# EAGLE board waterius-factory-3.2 (EAGLE 9.0.1)
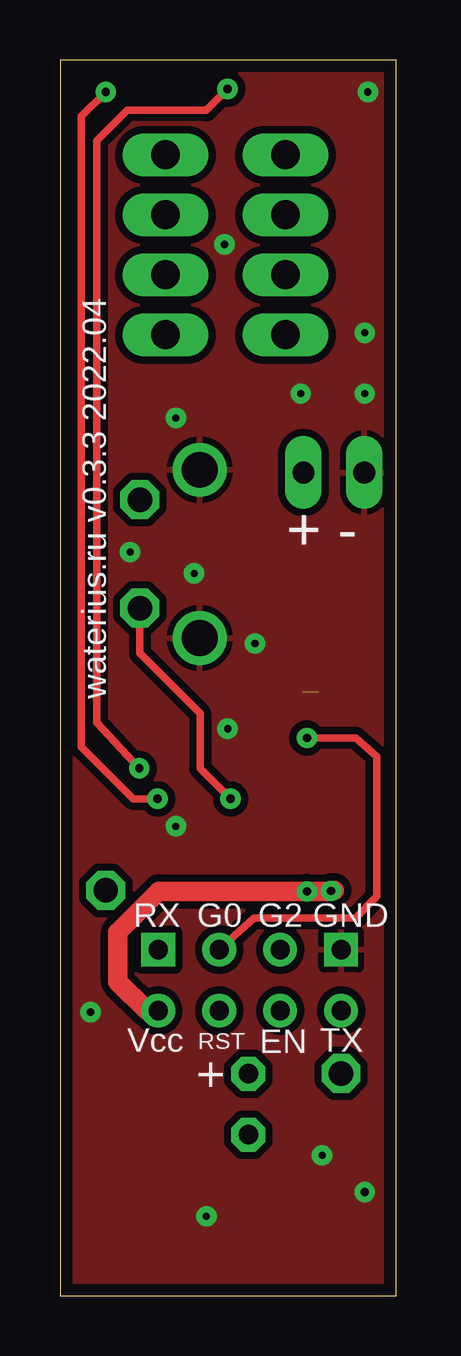
[diagram p0: board, top side]
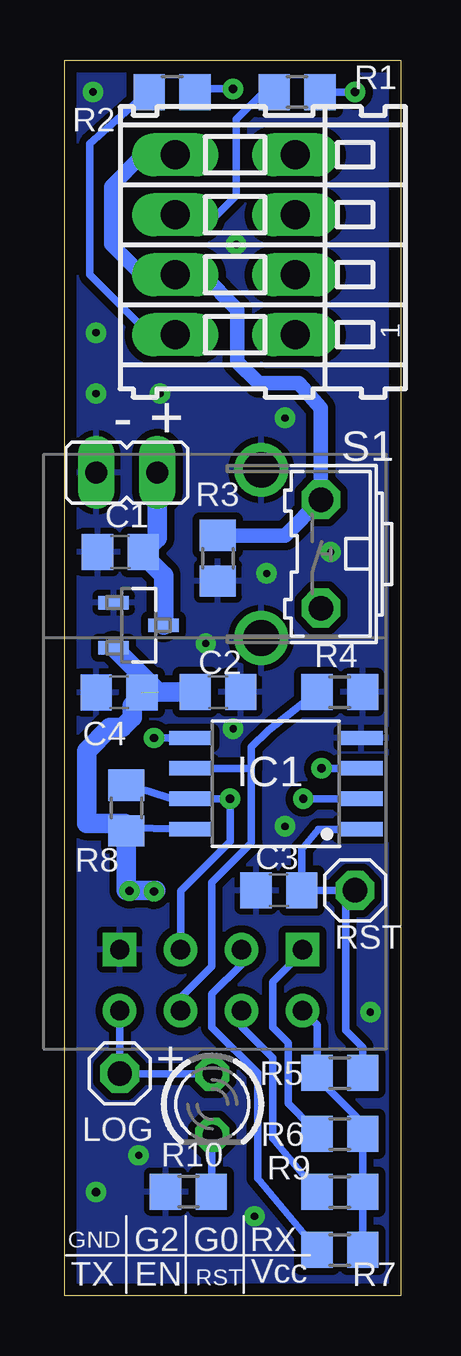
[diagram p1: board, bottom side, seen from below]

Size 14 x 51.5 mm. Coordinates in mm from the lower left corner, seen from the top.
Outline: 0,0 14,0 14,51.5 0,51.5 0,0
Copper layers (1*16): Top 0.035mm / dielectric 1.5mm / Bottom 0.035mm
Design rules "waterius-factory-3.0": minimum track width 0.25mm, minimum drill 0.3mm, track to track 0.205mm, track to pad 0.205mm, pad to pad 0.205mm, via to via 0.205mm, smd to smd 6mil, copper to edge 0.5mm, drill to drill 0.2mm, minimum pad ring 0.3mm, minimum via ring 0.25mm, stop-mask expansion 4mil, vias tented up to drill 0mil, thermal gap 10mil
Net classes: 0 default: clearance 0.205 mm; 1 power: width 0.508 mm, clearance 0.305 mm

## Footprints (pad centres in the part's own frame; a part is rotated, then mirrored left to right if it is on the bottom)
C0805 = smd 1.3 x 1.5: 1 -0.95,0; 2 0.95,0
8S2 = smd 0.6 x 1.8: 1 -1.905,-3.55; 2 -0.635,-3.55; 3 0.635,-3.55; 4 1.905,-3.55; 5 1.905,3.55; 6 0.635,3.55; 7 -0.635,3.55; 8 -1.905,3.55
JP1 = drill 0.914 long: 1 0,-1.27; 2 0,1.27
LED3MM = drill 0.813 octagon: A -1.27,0; K 1.27,0
1X01 = drill 1.016 octagon: 1 0,0
R0805 = smd 1.3 x 1.5: 1 -0.95,0; 2 0.95,0
B3F-31XX = drill 1.016 octagon: 1 -2.261,-1.245; 2 2.261,-1.245 | drill 1.499 pad 2.159: 3 -3.505,1.245; 4 3.505,1.245
ESP01 = drill 0.8: CH_PD -1.285,-8.178; GPIO0 1.255,-5.638; GPIO2 -1.285,-5.638; RST 1.255,-8.178; TX -3.825,-8.178; VCC 3.795,-8.178 | drill 0.8 square: GND -3.825,-5.638; RX 3.795,-5.638
SOT95P237X112-3N = smd 0.559 x 1.27: 1 -0.94,-1.041; 2 0.94,-1.041; 3 0,1.041
233-104 = drill 1.2 long: A1 -3.75,2.5; A2 -1.25,2.5; A3 1.25,2.5; A4 3.75,2.5; B1 -3.75,-2.5; B2 -1.25,-2.5; B3 1.25,-2.5; B4 3.75,-2.5

## Placement (x,y rotation side)
C1  1uF  [C0805]  11.68,30.99 180 bottom
C2  0.1uF  [C0805]  7.62,25.15 0 bottom
C3  0.1uF  [C0805]  5.08,16.89 180 bottom
C4  1uF  [C0805]  11.73,25.14 180 bottom
IC1  ATTINY85-20SU  [8S2]  5.21,21.34 90 bottom
JP1  [JP1]  11.41,34.31 270 bottom
LED1  RED  [LED3MM]  7.85,7.97 270 bottom
LOG  [1X01]  11.71,9.26 0 bottom
R1  3k3  [R0805]  4.32,50.16 0 bottom
R2  3k3  [R0805]  9.53,50.16 0 bottom
R3  300  [R0805]  7.62,30.73 270 bottom
R4  3k3  [R0805]  2.54,25.15 180 bottom
R5  3k3  [R0805]  2.54,9.27 180 bottom
R6  3k3  [R0805]  2.54,6.73 0 bottom
R7  3k3  [R0805]  2.54,1.91 0 bottom
R8  3k3  [R0805]  11.43,20.32 270 bottom
R9  3k3  [R0805]  2.54,4.32 0 bottom
R10  300  [R0805]  8.85,4.33 0 bottom
RST  RST  [1X01]  1.91,16.89 0 bottom
S1  [B3F-31XX]  4.57,30.91 90 bottom
U3  ESP01  [ESP01]  7.89,20.05 0 bottom
U$1  MCP1700T-3002E/TT  [SOT95P237X112-3N]  10.92,27.94 270 bottom
X1  [233-104]  6.9,43.8 90 bottom

## Library data of the parts
C1-C4 = rcl; SPICEPREFIX: C
IC1 = attiny85
JP1 = jumper
LED1 = led
LOG RST = pinhead
R1-R10 = resistor
S1 = switch-31-XX; MPN: B3F-3100; OC_FARNELL: 959704; OC_NEWARK: 36M3582
U3 = esp8266modules
U$1 = MCP1700T-3002E_TT; AVAILABILITY: Unavailable; DESCRIPTION: MCP1700 Series 250 mA 3 V Fixed Output LDO Voltage Regulator - SOT-23; MF: Microchip; MP: MCP1700T-3002E/TT; PACKAGE: SOT-23 Microchip; PRICE: None
X1 = con-wago255; MPN: 233-104; OC_FARNELL: unknown; OC_NEWARK: 28K9046

## Nets
+3V [power]: C2.1 C4.1 IC1.8 R5.2 R6.2 R7.2 R8.2 R9.2 U3.VCC U$1.2
GND [power]: C1.2 C2.2 C3.2 C4.2 IC1.4 JP1.1 R3.2 R4.1 R10.1 S1.3 S1.4 U3.GND U$1.1
GND1 [power]: R3.1 S1.2 X1.A2 X1.A4
IN1: IC1.2 R1.2
IN2: IC1.3 R2.2
N$2: R6.1 U3.RX
N$3: R9.1 U3.RST
N$5: LED1.A LOG.1 U3.TX
N$6: LED1.K R10.2
N$7: R1.1 X1.A3
N$8: R2.1 X1.A1
PRG_RST: C3.1 IC1.1 R5.1 RST.1
SCK: IC1.7 R8.1 S1.1 U3.GPIO2
SDA: IC1.5 R7.1 U3.GPIO0
VBAT [power]: C1.1 JP1.2 U$1.3
WAKE_UP: IC1.6 R4.2 U3.CH_PD

## Tracks (layer width: path | path; a pad name or v marks a point on that pad's centre or on a via)
+3V  (via drill 0.35)  (1 unrouted)
  Top 0.813: U3.VCC 3.62,11.88 2.41,13.08 2.41,15.14 4.12,16.84 v10.29,16.84 11.28,16.84 v11.3,16.86 11.43,16.89
  Bottom 0.305: R7.2 R9.2 R6.2 1.59,7.18 3.49,9.08 R5.2 3.49,11.27 U3.VCC | IC1.8 11.11,19.5 R8.2
  Bottom 0.813: U$1.2 10.11,25.15 C2.1 | C4.1 11.2,24.6 11.2,24.1 11.61,23.68 12.12,23.68 13.09,22.7 13.09,19.68 11.5,19.68 R8.2 11.43,16.89 10.2,16.89 10.24,16.84 v10.29,16.84
GND  (via drill 0.3 pad 0.85, 0.35 pad 0.85)
  other vias: 12.7,4.32 12.83,50.16 6.99,23.62 8.13,27.18 12.7,40.13 10.03,37.59 6.1,3.3 2.92,30.99 1.27,11.81 12.7,37.59 5.59,30.1 4.83,36.58 6.86,43.81 10.92,5.84 4.83,19.56
  pour Bottom: 0,0 14,0 14,51.5 0.01,51.51
  pour Top: 0,0 14,0 14,51.5 0,51.5
GND1
  Bottom 0.61: X1.A4 10.74,47.55 12.06,46.23 12.06,43.81 10.8,42.55 X1.A2 8.26,42.55 6.81,41.1 6.81,38.91 5.92,38.03 4.25,38.03 3.33,36.98 S1.2 4.82,31.68 R3.1
IN1  (via drill 0.35)
  Top 0.305: v1.91,50.16 0.89,49.15 0.89,22.86 3.05,20.7 v4.06,20.7
  Bottom 0.305: IC1.2 v4.06,20.7 4.19,20.7 | R1.2 v1.91,50.16
IN2  (via drill 0.35)
  Top 0.305: v6.99,50.29 6.1,49.4 2.79,49.4 1.52,48.13 1.52,23.88 v3.3,21.97
  Bottom 0.305: IC1.3 v3.3,21.97 | R2.2 8.45,50.29 v6.99,50.29
N$2
  Bottom 0.305: U3.RX 4.09,14.32 5.33,13.08 5.33,11.18 4.7,10.54 4.7,8 3.68,6.99 R6.1
N$3
  Bottom 0.305: R9.1 5.33,6.54 5.33,9.91 6.63,11.21 U3.RST
N$5
  Bottom 0.305: U3.TX LOG.1 11.7,9.24 LED1.A
N$6
  Bottom 0.305: LED1.K 7.9,4.11 R10.2
N$7
  Bottom 0.203: 5.46,50.16 R1.1
  Bottom 0.305: X1.A3 7.66,45.05 6.86,45.85 6.86,49.02 5.71,50.16 5.46,50.16
N$8
  Bottom 0.305: X1.A1 10.46,40.05 12.95,42.55 12.95,48.01 10.54,50.16 R2.1
PRG_RST
  Bottom 0.305: 2.29,16.89 C3.1 4.13,18.6 3.43,19.43 IC1.1 | R5.1 1.59,10.35 2.29,11.05 2.29,16.89 | 2.29,16.89 RST.1
SCK  (via drill 0.35)
  Top 0.305: S1.1 3.33,26.77 5.84,24.26 5.84,21.97 v7.11,20.7
  Bottom 0.305: R8.1 10.47,21.02 9.53,20.7 IC1.7 v7.11,20.7 7.11,18.92 9.18,16.86 U3.GPIO2
SDA  (via drill 0.35)
  Top 0.305: U3.GPIO0 8.09,15.75 12.32,15.75 13.21,16.64 13.21,22.48 12.32,23.24 v10.29,23.24
  Bottom 0.305: R7.1 5.97,4.89 5.97,9.27 7.87,11.18 7.87,12.57 6.63,13.81 U3.GPIO0 | v10.29,23.24 IC1.5
VBAT
  Bottom 0.61: 10.79,30.93 C1.1
  Bottom 0.813: U$1.3 9.88,30.01 10.79,30.93 10.14,31.58 JP1.2
WAKE_UP
  Bottom 0.305: U3.CH_PD 9.14,11.91 9.14,12.45 7.87,13.72 7.87,17.22 6.22,18.87 6.22,21.97 | R4.2 5.52,23.56 6.22,22.86 6.22,21.97 | 6.22,21.97 IC1.6

## Text on the board
tNames: waterius.ru v0.3.3 2022.04 | + - | RX | G0 | G2 | GND | Vcc | RST | EN | TX | +
bNames: - + | + | RX | G0 | G2 | GND | Vcc | RST | EN | TX